# Altium PCB EDP_V3.PcbDoc
Units mil, origin at the board's own origin, x right, y up, seen from the top; angles counter-clockwise.
Board outline 1496.06 x 2204.77 mil, 2 copper layers (Top Layer, Bottom Layer); 19 components, 14 nets, 61 pads, 4 vias.
Unrouted connection lines stored in the file: 1.
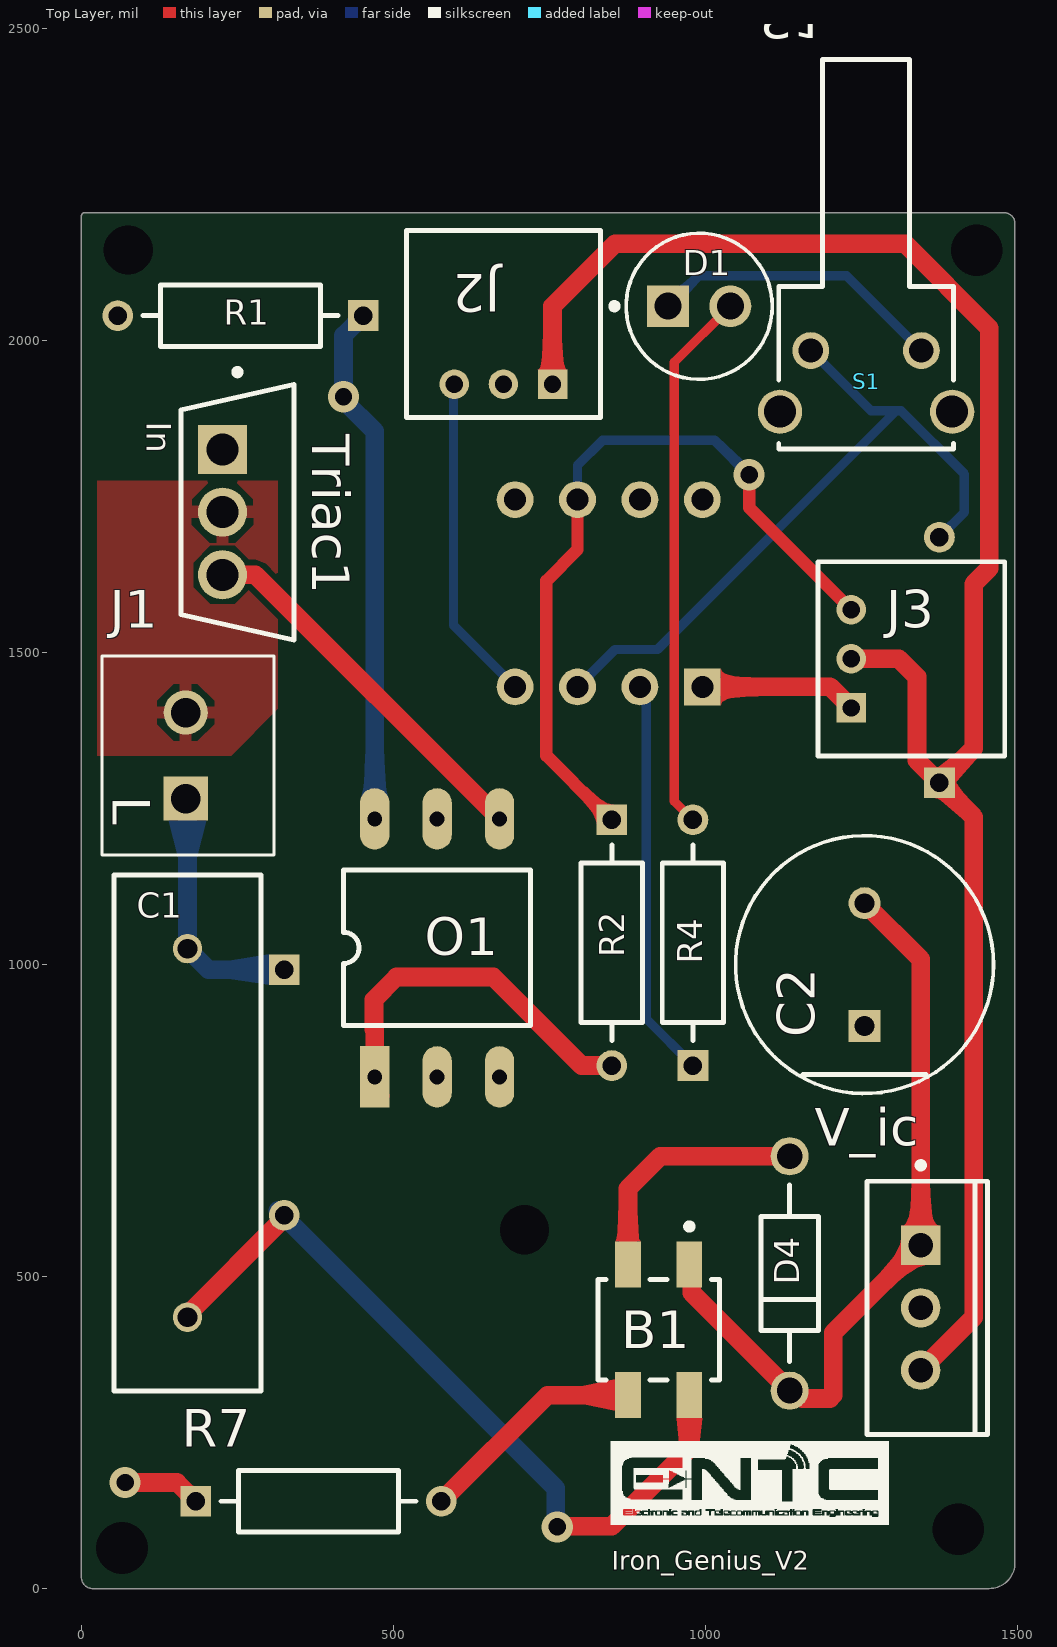
[diagram p0: Top Layer view]
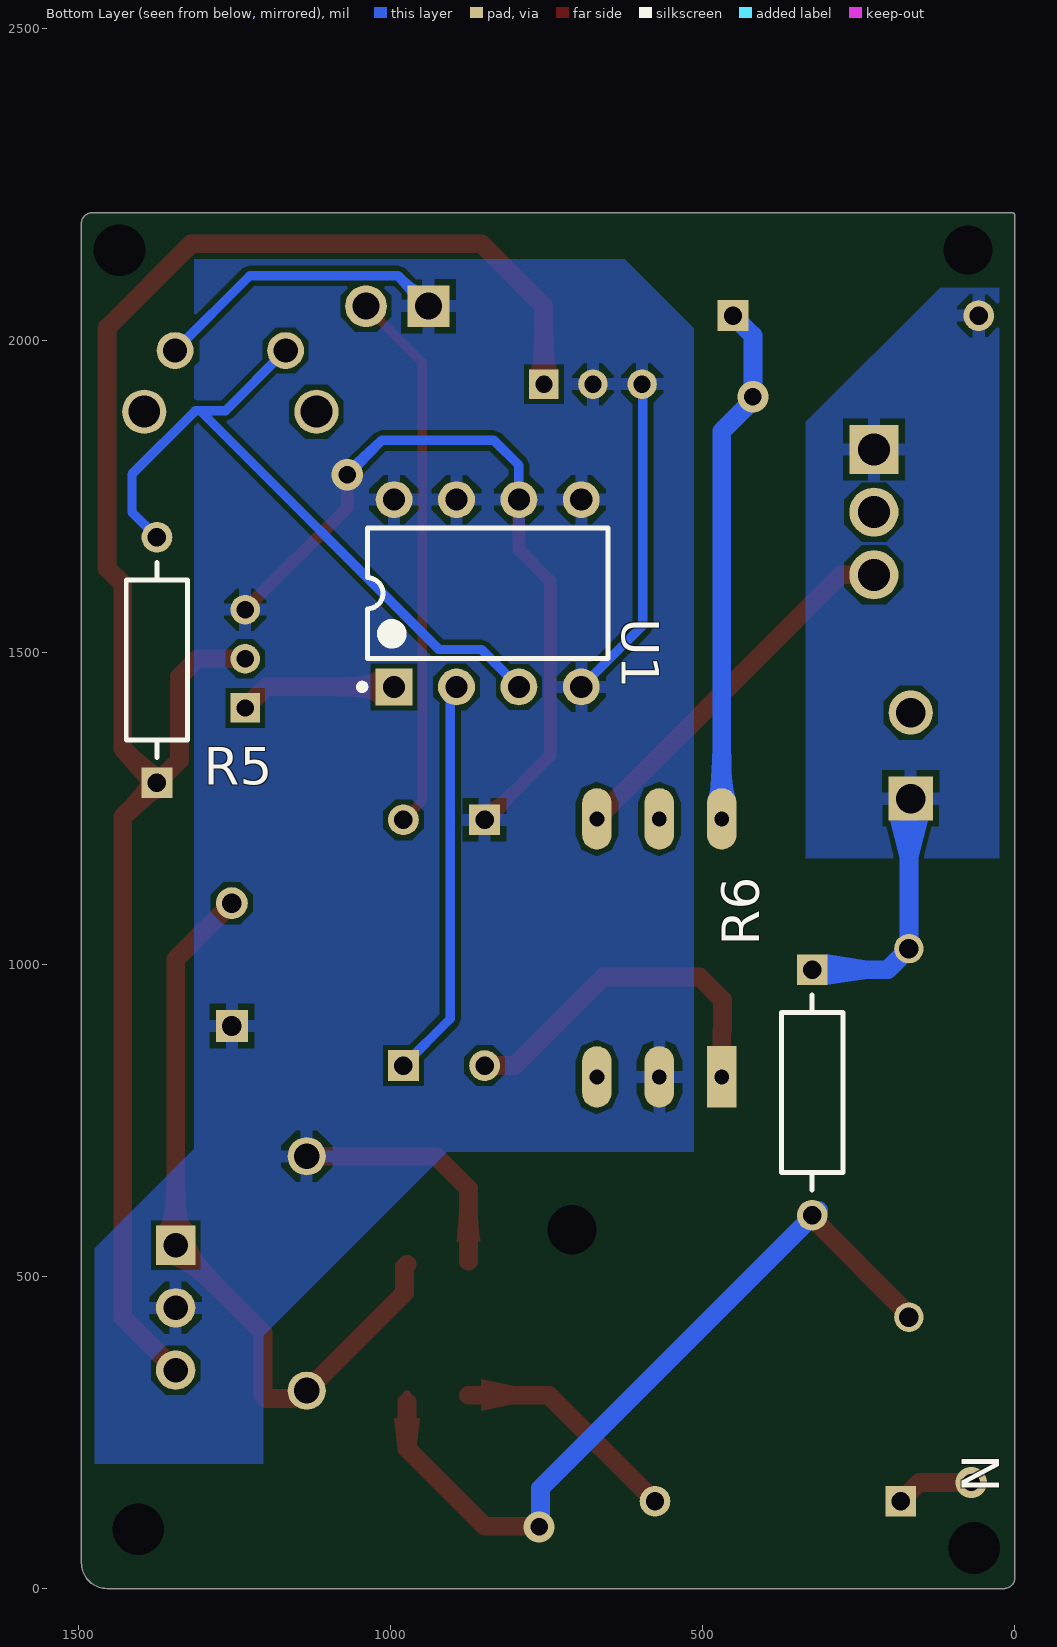
[diagram p1: Bottom Layer view, seen from below]
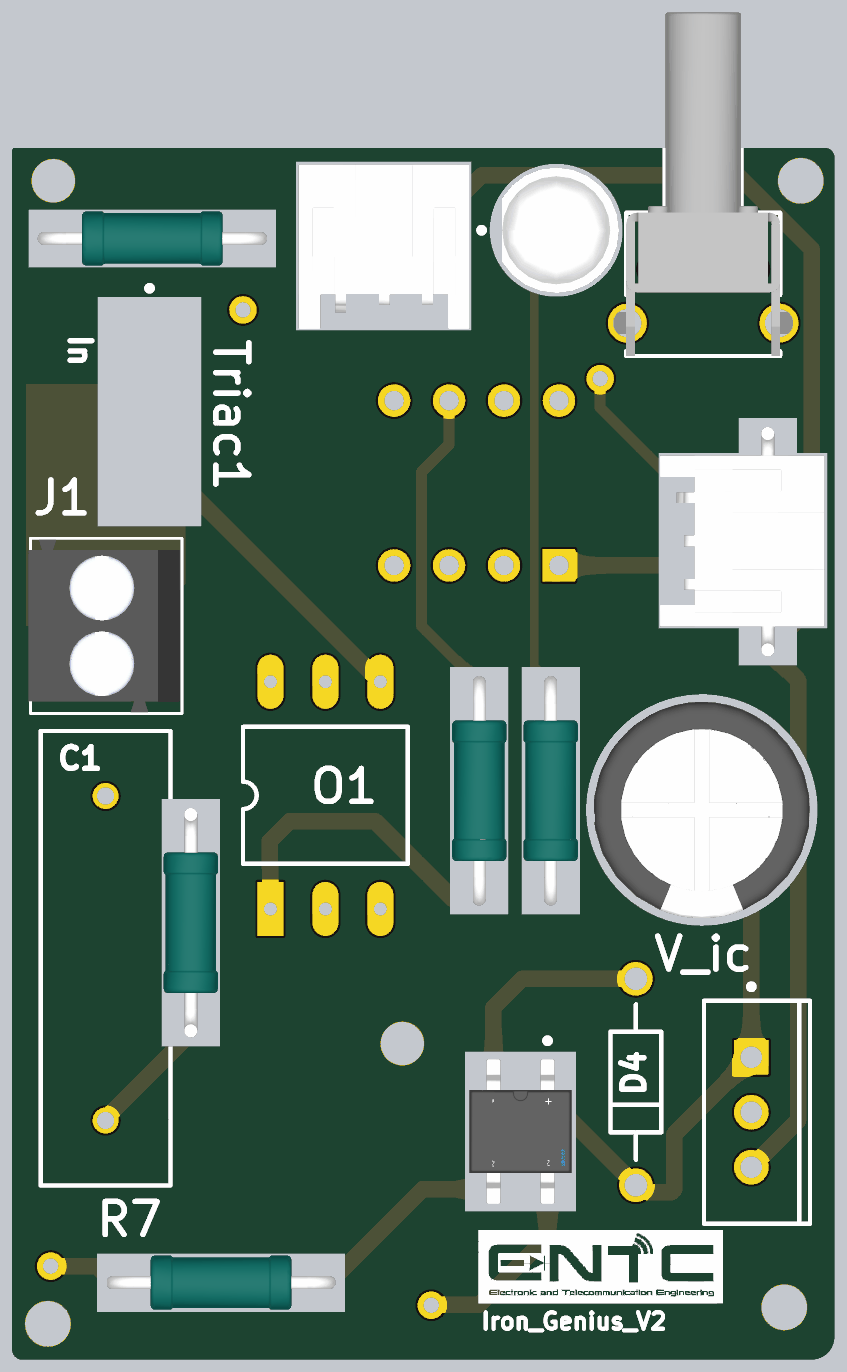
[diagram p2: 3D render of the assembled board from above, using the file's embedded part models]

## Layer stack, top to bottom
Top Solder: solder mask 1, SM-001, Dk 4
Top Layer: signal copper 1.4
Dielectric 1: dielectric 12.6, FR-4, Dk 4.8
Bottom Layer: signal copper 1.4
Bottom Solder: solder mask 1, SM-001, Dk 4

## Board outline
0,18 0,2200 cw(c4.78,2200) 5.08,2204.77 cw(c5.23,2200.5) 5.9,2204.72 1479.28,2204.72 cw(c1479.28,2187.94) 1496.06,2187.94 1496.06,41.06 cw(c1455,41.06) 1455,0 18,0 cw(c18,18)

## Design rules (kind name [scope] priority, off if disabled: settings)
BoardOutlineClearance [All] p1: gap=11.81 ignorepadtopadclearanceinfootprint=FALSE except(15.75: Arc-SplitBarrior Arc-SplitContinuation Track-SplitBarrior Track-SplitContinuation SMDPad-SplitBarrior SMDPad-SplitContinuation THPad-SplitBarrior THPad-SplitContinuation Via-SplitBarrior Via-SplitContinuation Fill-SplitBarrior Fill-SplitContinuation Poly-SplitBarrior Poly-SplitContinuation Region-SplitBarrior Region-SplitContinuation Text-SplitBarrior Text-SplitContinuation)
Clearance "Clearance Different Nets" [All] p1: gap=7.87 ignorepadtopadclearanceinfootprint=FALSE except(3.5: Arc-Arc Arc-Track Arc-SMDPad Track-Track Track-SMDPad; 5: SMDPad-SMDPad SMDPad-Via THPad-Via Via-Via; 10: Arc-Via Arc-Text Track-Via Track-Text SMDPad-Text THPad-Text Via-Text Fill-Text Poly-Text Region-Text Text-Text; 19.68: THPad-THPad Via-Hole)
Clearance "Clearance Same Nets" [All] p2: gap=7.87 ignorepadtopadclearanceinfootprint=FALSE except(3.5: Arc-Arc Arc-Track Arc-SMDPad Track-Track Track-SMDPad SMDPad-SMDPad; 5: SMDPad-Via THPad-Via; 10: Arc-Via Arc-Text Track-Via Track-Text SMDPad-Text THPad-Text Via-Via Via-Text Fill-Text Poly-Text Region-Text Text-Text)
Clearance "Clearance Bottom Layer" [OnLayer('Bottom Layer')] p3: gap=8 ignorepadtopadclearanceinfootprint=TRUE except(10: Arc-Text Track-Text SMDPad-Text THPad-Text Via-Text Fill-Text Poly-Text Region-Text Text-Text)
Clearance "Clearance Top Layer" [OnLayer('Top Layer')] p4: gap=8 ignorepadtopadclearanceinfootprint=TRUE except(10: Arc-Text Track-Text SMDPad-Text THPad-Text Via-Text Fill-Text Poly-Text Region-Text Text-Text)
HoleSize [All] p1: absolutevalues=TRUE maxlimit=248.03 minlimit=7.87 maxpercent=80.000 minpercent=20.000
MinimumAnnularRing [All] p1: minimumring=5.12
MinimumSolderMaskSliver [All] p1: minsoldermaskwidth=3.94
PolygonConnect PolygonConnect_1 [All] p1: thpad.connectstyle=Relief thpad.reliefconductorwidth=20 thpad.reliefentries=4 thpad.polygonreliefangle="90 Angle" thpad.airgapwidth=10 smdpad.connectstyle=Relief smdpad.reliefconductorwidth=20 smdpad.reliefentries=4 smdpad.polygonreliefangle="90 Angle" smdpad.airgapwidth=10 via.connectstyle=Direct via.reliefconductorwidth=20 via.reliefentries=4 via.polygonreliefangle="90 Angle" via.airgapwidth=10
RoutingCorners [All] p1: cornerstyle=Round minsetback=100 maxsetback=100
RoutingVias [All] p1: holewidth=19.68 width=39.37 viastyle="Through Hole" minholewidth=7.87 minwidth=13.78 maxholewidth=39.37 maxwidth=78.74
SilkToSilkClearance [All] p1: silktosilkclearance=3.94
SilkToSolderMaskClearance [IsPad] p1: minsilkscreentomaskgap=3.94 clearancetoexposedcopper=TRUE
SolderMaskExpansion [All] p1: expansion=4 istentingtop=FALSE
SupplyNets "Schematic Supply Nets_1" [InNet('Triac output')] p1: voltage=0.000
Width [All] p1: maxlimit=100 minlimit=3.5 preferedwidth=15
25 further rules are at their usual default settings.

## Classes and differential pairs
component class EDP_IronGenius_V3: B1 C2 D1 D4 J1 J2 J3 O1 R1 R2 R4 R5 R6 R7 S1 Triac1 U1 V_ic

## Components (designator, comment, footprint, x,y, rotation, side; value= is the part's Value field where it differs from the comment)
B1 "Bridge_rectifier" "Bridge rectifier" 925,415 r270 top
C1 "" "Capacitor 470nF 400V AC" 170,435 r90 top value=470nF
C2 "Electrolytic cap" "Electrolytic cap" 1255,1000 r90 top value=220uF
D1 "LED_Ind" LED_ind 990,2055 r0 top
D4 "Zener diode" Diode 1130,495 r90 top
J1 "AC power_connector" "AC power_connector" 162.13,1340 r90 top
J2 "Jack_for_sensor" Sensor_jack 676.26,2026.46 r0 top
J3 "Slide switch connector" Sensor_jack 1330,1490 r270 top
O1 "MOC3021" DIP6 470,820 r90 top
R1 "10K resistor" "10K resistor" 255,2040 r180 top value=1kR
R2 "220ohm_res" 220ohm_res 850,1035 r270 top value=220R
R4 "220ohm_res" 220ohm_res 980,1035 r90 top value=220R
R5 "1M_ohm" 1M_om 1375,1488.15 r90 bottom value=1MR
R6 "1M_ohm" 1M_om 325,795 r270 bottom value=1MR
R7 "220ohm_res" 220ohm_res 380,140 r0 top value=220R
S1 "PushButton" PushButton 1257.42,1934.98 r270 top
Triac1 "Triac" "Triac BTA16-600" 235,1730 r0 top
U1 "PIC12F675-I/P" PDIP300-P8 845,1605 r90 bottom
V_ic "MC7805CTG" IC7805 1365,445 r0 top

## Footprints (in the part's own frame and the unit in brackets; to place one, negate y for a bottom-side part, rotate by r counter-clockwise, add the part's x,y. Pads: shape width x height; smd on the part's side, far side on the other; paste and mask are expansions set on the pad)
1M_om [mm]
  rect 1.25x1.25 hole 0.75 paste-2539.97 mask+0: 1(-5,0)
  round 1.25 hole 0.75 paste-2539.97 mask+0: 2(5,0)
  silkscreen extent -3.98,-1.25 3.98,1.25, body extent -5.3,-1.25 5.3,1.25, height 2.5
"10K resistor" [mm]
  rect 1.25x1.25 hole 0.75 paste-2539.97 mask+0: 1(-5,0)
  round 1.25 hole 0.75 paste-2539.97 mask+0: 2(5,0)
  silkscreen extent -3.98,-1.25 3.98,1.25, body extent -5.3,-1.25 5.3,1.25, height 2.5
220ohm_res [mm]
  rect 1.25x1.25 hole 0.75 paste-2539.97 mask+0: 1(-5,0)
  round 1.25 hole 0.75 paste-2539.97 mask+0: 2(5,0)
  silkscreen extent -3.98,-1.25 3.98,1.25, body extent -5.72,-1.35 5.72,1.35, height 0.25
"AC power_connector" [mm]
  rect 1.8x1.8 / inner round 1.8 / far side rect 1.8x1.8 hole 1.2: 1(-1.877,-0.127)
  round 1.8 hole 1.2: 2(1.623,-0.127)
  silkscreen extent -4.18,-3.73 3.92,3.27, body extent -4.13,-3.63 3.87,3.37, height 8.4
"Bridge rectifier" [mm]
  rect 1.875x1.05 smd paste+0 mask+0: 1(-2.658,1.25) 2(2.667,1.25) 3(-2.658,-1.25) 4(2.667,-1.25)
  silkscreen extent -4.32,-2.47 2.05,2.47, body extent -3.7,-2.58 3.7,2.58, height 0.25
"Capacitor 470nF 400V AC" [mm]
  round 1.2 hole 0.8: 1(0,0) 2(15,0)
  silkscreen extent -3,-3 18,3
Diode [mm]
  round 1.55 hole 1.05: 1(-4.516,-0.127) 2(5.024,-0.127)
  silkscreen extent -3.34,-1.3 3.85,1.05
DIP6 [mm]
  rect 2.5x1.2 hole 0.6: 1(0,0)
  oval 2.5x1.2 hole 0.6: 2(0,-2.54) 3(0,-5.08) 4(10.5,-5.08) 5(10.5,-2.54) 6(10.5,0)
  silkscreen extent 2.08,-6.35 8.41,1.27
"Electrolytic cap" [mm]
  rect 1.3x1.3 hole 0.8 paste-2539.97 mask+0: 1(-2.5,0)
  round 1.3 hole 0.8 paste-2539.97 mask+0: 2(2.5,0)
  silkscreen extent -5.25,-5.25 5.25,5.25, body extent -5.35,-5.35 5.35,5.35, height 0.25
IC7805 [mm]
  rect 1.6x1.6 hole 1: 1(-0.508,2.667)
  round 1.6 hole 1: 2(-0.508,0.127) 3(-0.508,-2.413)
  silkscreen extent -2.69,-5.02 2.21,6.05, body extent -2.67,-5.02 2.18,5.28, height 19.68
LED_ind [mm]
  rect 1.7x1.7 hole 1.1 paste-2539.97 mask+0: 1(-1.27,0)
  round 1.7 hole 1.1 paste-2539.97 mask+0: 2(1.27,0)
  silkscreen extent -3.57,-2.97 2.98,2.97, body extent -2.5,-2.9 2.89,2.9, height 9.11
PDIP300-P8 [mm] "8-Pin Plastic Dual In-Line Package (PDIP)"
  rect 1.5x1.5 hole 0.9: 1(-4.064,3.81)
  round 1.5 hole 0.9: 2(-4.064,1.27) 3(-4.064,-1.27) 4(-4.064,-3.81) 5(3.556,-3.81) 6(3.556,-1.27) 7(3.556,1.27) 8(3.556,3.81)
  silkscreen extent -4.19,-4.9 2.4,5.24, body extent -3.8,-4.9 3.3,4.9, height 4.32
PushButton [mm]
  round 1.5 hole 0.99: 1(-1.245,-2.25) 2(-1.245,2.25)
  round 1.8 hole 1.3: MH1(1.245,-3.505) MH2(1.245,3.505)
  silkscreen extent -13.09,-3.55 2.77,3.55, body extent -13.11,-4.2 2.76,4.2, height 7.01
Sensor_jack [mm]
  rect 1.2x1.2 hole 0.7 paste-2539.97 mask+0: 1(2,-2.45)
  round 1.2 hole 0.7 paste-2539.97 mask+0: 2(0,-2.45) 3(-2,-2.45)
  silkscreen extent -3.95,-3.8 3.95,3.8, body extent -4.04,-3.94 4.06,3.86, height 0.25
"Triac BTA16-600" [mm]
  rect 2x2 hole 1.3 paste-2539.97 mask+0: 1(-0.226,2.423)
  round 2 hole 1.3 paste-2539.97 mask+0: 2(-0.226,-0.127) 3(-0.226,-2.677)
  silkscreen extent -1.92,-5.33 2.68,5.7

## Part data
B1: "Bridge Rectifier Diode, 1 Phase, 0.8A, 1000V V(RRM), Silicon", Manufacturer=Diodes, Manufacturer Part Number=MB10F-13, Supplier Part Number=MB10F-13DICT-ND, Category=Diodes, ComponentLink1Description=https://datasheet.ciiva.com:443/pdfs/VipMasterIC/IC/DIOD/DIOD-S-A0003097097/DIOD-S-A0003097097-1.pdf?src-supplier=IHS+Markit, ComponentLink1URL=https://datasheet.ciiva.com:443/pdfs/VipMasterIC/IC/DIOD/DIOD-S-A0003097097/DIOD-S-A0003097097-1.pdf?src-supplier=IHS+Markit, ComponentLink2Description=https://www.diodes.com/assets/Datasheets/MB10F.pdf?src-supplier=Digikey, ComponentLink2URL=https://www.diodes.com/assets/Datasheets/MB10F.pdf?src-supplier=Digikey, Diode Type=RECTIFIER, JESD-609 Code=e3, Pricing="1=0.56, 10=0.346, 100=0.2202, 500=0.16594, 1000=0.13963, 2000=0.13364 (USD)", Reach SVHC Compliant=No, RoHS=Yes, RoHS Compliant=Yes, Stock=10908, Supplier=Digikey, Terminal Finish=Tin
C1: library part Component_2, "Film Capacitor, Polypropylene, 630V, 5% +Tol, 5% -Tol, 0.47uF, Through Hole Mount", Capacitor Type=FILM, Dielectric Material=Polypropylene, Manufacturer=KEMET, Manufacturer Part Number=R76PR3470SE30J, Max Operating Temperature=85°C, Min Operating Temperature=-55°C, Package Shape=Rectangular, Package Style=RadialMeter, Rated AC Voltage (URac)=400V, Rated DC Voltage (URdc)=630V, Supplier Part Number=399-7615-ND, Tolerance  (fill in as +-)=5%, Additional Feature="RATED AC VOLTAGE (V): 400", Category="Film Capacitors", ComponentLink1Description=https://datasheet.ciiva.com:443/pdfs/VipMasterIC/IC/KEME/KEME-S-A0009156830/KEME-S-A0009156830-1.pdf?src-supplier=IHS+Markit, ComponentLink1URL=https://datasheet.ciiva.com:443/pdfs/VipMasterIC/IC/KEME/KEME-S-A0009156830/KEME-S-A0009156830-1.pdf?src-supplier=IHS+Markit, ComponentLink2Description=http://www.mouser.com/ds/2/212/KEM_F3034_R76-458534.pdf?src-supplier=Mouser, ComponentLink2URL=http://www.mouser.com/ds/2/212/KEM_F3034_R76-458534.pdf?src-supplier=Mouser, ComponentLink3Description=https://search.kemet.com/component-edge/download/datasheet/R76PR3470SE30J.pdf?src-supplier=Digikey, ComponentLink3URL=https://search.kemet.com/component-edge/download/datasheet/R76PR3470SE30J.pdf?src-supplier=Digikey, Height=22mm, Length=32mm, Mounting Technology="Through Hole", Packaging=Bulk, Pins=2, Pricing="1=3.32, 10=2.388, 50=1.9644, 480=1.56423, 960=1.47382, 1440=1.42641, 2880=1.35362, 5280=1.29756 (USD)", Reach SVHC Compliant=Yes, RoHS=Yes, RoHS Compliant=Yes, Stock=336, Supplier=Digikey, Terminal Pitch=27.5mm, Termination=Wire, Tolerance (fill in as +-)=5%, Width=13mm
C2: "Aluminum Electrolytic Capacitor, Polarized, Aluminum (wet), 50V, 20% +Tol, 20% -Tol, 220uF, Through Hole Mount", Capacitor Type=Aluminium, Leakage Current=110uA, Manufacturer=Panasonic, Manufacturer Part Number=EEU-FR1H221B, Manufacturer Series=FR, Max Operating Temperature=105°C, Min Operating Temperature=-40°C, Package Shape=Cylindrical, Package Style=RadialMeter, Rated DC Voltage (URdc)=50V, Ripple Current=1.155A, Supplier Part Number=P15375CT-ND, Tolerance  (fill in as +-)=20%, Category="Aluminum Electrolytic Capacitors", ComponentLink1Description=https://datasheet.ciiva.com:443/pdfs/VipMasterIC/IC/PANA/PANA-S-A0009000947/PANA-S-A0009000947-1.pdf?src-supplier=IHS+Markit, ComponentLink1URL=https://datasheet.ciiva.com:443/pdfs/VipMasterIC/IC/PANA/PANA-S-A0009000947/PANA-S-A0009000947-1.pdf?src-supplier=IHS+Markit, Diameter=10mm, Dielectric Material=Aluminium, JESD-609 Code=e3, Length=16mm, Mounting Technology="Through Hole", Packaging="Tape and Reel", Pins=2, Polarity=Polarized, Pricing="1=0.84, 10=0.53, 50=0.3992, 100=0.358 (USD)", Reach SVHC Compliant=Yes, RoHS=Yes, RoHS Compliant=Yes, Series=EEU-FR, Supplier=Digikey, Tan Delta=0.1, Terminal Finish=Tin, Terminal Pitch=5mm, Termination=Wire, Tolerance (fill in as +-)=20%
D1: "Single Color LED, Yellow, Tinted Diffused, T-1, 3mm", Color=Yellow, Forward Current=7mA, Forward Voltage=2.7V, Manufacturer="Broadcom Avago", Manufacturer Part Number=HLMP-1719, Max Operating Temperature=100°C, Min Operating Temperature=-40°C, Supplier Part Number=516-1309-ND, Category=LEDs, Channels=1, Color@wavelength=Yellow, ComponentLink1Description=https://datasheet.ciiva.com:443/pdfs/VipMasterIC/IC/AVGO/AVGOS05570/AVGOS05570-1.pdf?src-supplier=IHS+Markit, ComponentLink1URL=https://datasheet.ciiva.com:443/pdfs/VipMasterIC/IC/AVGO/AVGOS05570/AVGOS05570-1.pdf?src-supplier=IHS+Markit, ComponentLink2Description=https://datasheet.ciiva.com/11773/0900766b800204ad-11773897.pdf?src-supplier=Rs, ComponentLink2URL=https://datasheet.ciiva.com/11773/0900766b800204ad-11773897.pdf?src-supplier=Rs, ComponentLink3Description=https://datasheet.ciiva.com/19482/253673-19482303.pdf?src-supplier=Jameco, ComponentLink3URL=https://datasheet.ciiva.com/19482/253673-19482303.pdf?src-supplier=Jameco, ComponentLink4Description=https://datasheet.ciiva.com/15117/getdatasheetpartid-111138-15117505.pdf?src-supplier=Verical, ComponentLink4URL=https://datasheet.ciiva.com/15117/getdatasheetpartid-111138-15117505.pdf?src-supplier=Verical, ComponentLink5Description=https://datasheet.ciiva.com/1244/1715378-1244676.pdf?src-supplier=Element14, ComponentLink5URL=https://datasheet.ciiva.com/1244/1715378-1244676.pdf?src-supplier=Element14, ComponentLink6Description=https://datasheet.ciiva.com/29334/180618-da-01-en-led-3mm-hlmp-1719-gelb-29334897.pdf?src-supplier=Conrad, ComponentLink6URL=https://datasheet.ciiva.com/29334/180618-da-01-en-led-3mm-hlmp-1719-gelb-29334897.pdf?src-supplier=Conrad, ComponentLink7Description=https://datasheet.ciiva.com/14183/efhlmp17x-47xx-en-14183894.pdf?src-supplier=Distrelec, ComponentLink7URL=https://datasheet.ciiva.com/14183/efhlmp17x-47xx-en-14183894.pdf?src-supplier=Distrelec, ComponentLink8Description=https://datasheet.ciiva.com/14605/70157746-14605453.pdf?src-supplier=Allied+Electronics, ComponentLink8URL=https://datasheet.ciiva.com/14605/70157746-14605453.pdf?src-supplier=Allied+Electronics, JESD-609 Code=e3, Lens Style=Diffused,Tinted, Luminous Intensity-Nom=2.1mcd, Mounting Technology=Radial, Optoelectronic Device Type="SINGLE COLOR LED", Overall Height=4.445mm, Packaging=Bulk, Pins=2, Pricing="1=0.42, 10=0.287, 100=0.2048, 500=0.1675, 1000=0.15521, 2000=0.14474, 6000=0.13128, 10000=0.12612, 26000=0.11801 (USD)", Reach SVHC Compliant=Yes, RoHS=Yes, RoHS Compliant=Yes, Shape=Round, Size=3mm, Stock=87102, Supplier=Digikey, T-code=T-1, Terminal Finish=Tin, Terminal Pitch=2.54mm, Viewing Angle=50°
D4: library part Diode, "Rectifier Diode, 1 Phase, 1 Element, 1A, 1000V V(RRM), Silicon, DO-41", Case Connection=Isolated, Forward Voltage=1.1V, Manufacturer="ON Semiconductor", Manufacturer Part Number=1N4007RLG, Max Operating Temperature=175°C, Max Output current=1A, Min Operating Temperature=-65°C, Non-rep Pk Forward Current-Max=30A, Package Body Material=Plastic, Package Shape=Round, Package Style="LONG FORMMeter", Peak Reflow Temperature (Cel)=260°C, Rep Pk Reverse Voltage-Max=1kV, Supplier Part Number=1N4007RLGOSCT-ND, Time @ Peak Reflow Temperature-Max (s)=40s, Category="Rectifier Diodes", ComponentLink1Description=https://datasheet.ciiva.com:443/pdfs/VipMasterIC/IC/ONSM/ONSM-S-A0005492811/ONSM-S-A0005492811-1.pdf?src-supplier=IHS+Markit, ComponentLink1URL=https://datasheet.ciiva.com:443/pdfs/VipMasterIC/IC/ONSM/ONSM-S-A0005492811/ONSM-S-A0005492811-1.pdf?src-supplier=IHS+Markit, ComponentLink2Description=https://datasheet.ciiva.com/915/1n4001-d-915344.pdf?src-supplier=Digikey, ComponentLink2URL=https://datasheet.ciiva.com/915/1n4001-d-915344.pdf?src-supplier=Digikey, ComponentLink3Description=https://datasheet.ciiva.com/915/1n4001-d-915345.pdf?src-supplier=Digikey, ComponentLink3URL=https://datasheet.ciiva.com/915/1n4001-d-915345.pdf?src-supplier=Digikey, ComponentLink4Description=https://datasheet.ciiva.com/3304/1n4001-d-3304216.pdf?src-supplier=Avnet, ComponentLink4URL=https://datasheet.ciiva.com/3304/1n4001-d-3304216.pdf?src-supplier=Avnet, Diode Element Material=SILICON, Diode Type=RECTIFIER, JEDEC-95 Code=DO-41, JESD-30 Code=O-PALF-W2, JESD-609 Code=e3, Number of Elements=1, Pins=2, Pricing="1=0.19, 10=0.116, 100=0.0724, 500=0.0535, 1000=0.04635, 2000=0.04211 (USD)", Qualification Status="Not Qualified", Reach SVHC Compliant=No, RoHS=Yes, RoHS Compliant=Yes, Stock=2581, Supplier=Digikey, Surface Mount=No, Terminal Finish=Tin, Terminal Form=Wire, Terminal Position=AXIAL
J1: "Barrier Strip Terminal Block, 10A, 1 Row(s), 1 Deck(s)", Current Rating=10A, Manufacturer="On-Shore Technology", Manufacturer Part Number=OSTTE020104, Voltage Rating=125V, Additional Feature="STANDARD: UL 94V-0, THERMOPLASTIC", Category="Terminal Blocks", ComponentLink1Description=https://datasheet.ciiva.com:443/pdfs/VipMasterIC/IC/ONST/ONST-S-A0002844285/ONST-S-A0002844285-1.pdf?src-supplier=IHS+Markit, ComponentLink1URL=https://datasheet.ciiva.com:443/pdfs/VipMasterIC/IC/ONST/ONST-S-A0002844285/ONST-S-A0002844285-1.pdf?src-supplier=IHS+Markit, ComponentLink2Description=http://www.on-shore.com/wp-content/uploads/2015/09/osttexx0164.pdf?src-supplier=Verical, ComponentLink2URL=http://www.on-shore.com/wp-content/uploads/2015/09/osttexx0164.pdf?src-supplier=Verical, ComponentLink3Description=http://www.on-shore.com/wp-content/uploads/2015/09/osttexx0164.pdf?src-supplier=Digikey, ComponentLink3URL=http://www.on-shore.com/wp-content/uploads/2015/09/osttexx0164.pdf?src-supplier=Digikey, ComponentLink4Description=http://www.on-shore.com/wp-content/uploads/2015/09/osttexx0164.pdf?src-supplier=Arrow+Electronics, ComponentLink4URL=http://www.on-shore.com/wp-content/uploads/2015/09/osttexx0164.pdf?src-supplier=Arrow+Electronics, Fastening Method=SCREW, Mounting Technology=Board, Number of Decks=1, Number of Rows=1, Number of Ways=2, Pricing="1=0.2592, 10=0.193, 25=0.1668, 50=0.1485, 100=0.1326, 250=0.1154, 500=0.1046, 1000=0.0957, 5000=0.0823 (USD)", Reach SVHC Compliant=Yes, RoHS=Yes, RoHS Compliant=Yes, Safety Approval=UL,CUL, Stock=2, Supplier="Arrow Electronics", Supplier Part Number=OSTTE020104, Terminal and Terminal Block Type="BARRIER STRIP TERMINAL BLOCK", Wire/Cable Gauge=16AWG
J2: "Conn Shrouded Header (4 Sides) HDR 3 POS 2mm Solder RA Side Entry Thru-Hole Box", Manufacturer=JST, Manufacturer Part Number=S3B-PH-K-S(LF)(SN), Supplier Part Number=306-S3BPHKSLFSN, Category="Headers and Wire Housings", ComponentLink1Description=http://www.farnell.com/datasheets/2057211.pdf?src-supplier=Farnell, ComponentLink1URL=http://www.farnell.com/datasheets/2057211.pdf?src-supplier=Farnell, ComponentLink2Description=https://datasheet.octopart.com/S3B-PH-K-S%28LF%29%28SN%29-JST-datasheet-56537.pdf?src-supplier=Future+Electronics, ComponentLink2URL=https://datasheet.octopart.com/S3B-PH-K-S%28LF%29%28SN%29-JST-datasheet-56537.pdf?src-supplier=Future+Electronics, ComponentLink3Description=http://www.farnell.com/datasheets/2057211.pdf?src-supplier=Newark, ComponentLink3URL=http://www.farnell.com/datasheets/2057211.pdf?src-supplier=Newark, ComponentLink4Description=http://www.jst-mfg.com/product/pdf/eng/ePH.pdf?src-supplier=Digikey, ComponentLink4URL=http://www.jst-mfg.com/product/pdf/eng/ePH.pdf?src-supplier=Digikey, ComponentLink5Description=http://datasheet.octopart.com/S3B-PH-K-S-%28LF%29%28SN%29-JST-datasheet-15068535.pdf?src-supplier=TME, ComponentLink5URL=http://datasheet.octopart.com/S3B-PH-K-S-%28LF%29%28SN%29-JST-datasheet-15068535.pdf?src-supplier=TME, ComponentLink6Description=https://datasheet.octopart.com/S3B-PH-K-S%28LF%29%28SN%29-JST-datasheet-147762421.pdf?src-supplier=LKR, ComponentLink6URL=https://datasheet.octopart.com/S3B-PH-K-S%28LF%29%28SN%29-JST-datasheet-147762421.pdf?src-supplier=LKR, Pricing="1=0.15, 10=0.125, 50=0.125, 100=0.103, 1000=0.072, 10000=0.067 (USD)", RoHS=Yes, Stock=230157, Supplier=Mouser
J3: library part Jack_for_sensor, "Conn Shrouded Header (4 Sides) HDR 3 POS 2mm Solder RA Side Entry Thru-Hole Box", Manufacturer=JST, Manufacturer Part Number=S3B-PH-K-S(LF)(SN), Supplier Part Number=306-S3BPHKSLFSN, Category="Headers and Wire Housings", ComponentLink1Description=http://www.farnell.com/datasheets/2057211.pdf?src-supplier=Farnell, ComponentLink1URL=http://www.farnell.com/datasheets/2057211.pdf?src-supplier=Farnell, ComponentLink2Description=https://datasheet.octopart.com/S3B-PH-K-S%28LF%29%28SN%29-JST-datasheet-56537.pdf?src-supplier=Future+Electronics, ComponentLink2URL=https://datasheet.octopart.com/S3B-PH-K-S%28LF%29%28SN%29-JST-datasheet-56537.pdf?src-supplier=Future+Electronics, ComponentLink3Description=http://www.farnell.com/datasheets/2057211.pdf?src-supplier=Newark, ComponentLink3URL=http://www.farnell.com/datasheets/2057211.pdf?src-supplier=Newark, ComponentLink4Description=http://www.jst-mfg.com/product/pdf/eng/ePH.pdf?src-supplier=Digikey, ComponentLink4URL=http://www.jst-mfg.com/product/pdf/eng/ePH.pdf?src-supplier=Digikey, ComponentLink5Description=http://datasheet.octopart.com/S3B-PH-K-S-%28LF%29%28SN%29-JST-datasheet-15068535.pdf?src-supplier=TME, ComponentLink5URL=http://datasheet.octopart.com/S3B-PH-K-S-%28LF%29%28SN%29-JST-datasheet-15068535.pdf?src-supplier=TME, ComponentLink6Description=https://datasheet.octopart.com/S3B-PH-K-S%28LF%29%28SN%29-JST-datasheet-147762421.pdf?src-supplier=LKR, ComponentLink6URL=https://datasheet.octopart.com/S3B-PH-K-S%28LF%29%28SN%29-JST-datasheet-147762421.pdf?src-supplier=LKR, Pricing="1=0.15, 10=0.125, 50=0.125, 100=0.103, 1000=0.072, 10000=0.067 (USD)", RoHS=Yes, Stock=230157, Supplier=Mouser
O1: "OPTOISOLATOR 4.17KV TRIAC 6DIP", Manufacturer="ON Semiconductor / Fairchild", Manufacturer Part Number=MOC3021M, Supplier Part Number=MOC3021MFS-ND, Category=Optocouplers, ComponentLink1Description=https://datasheet.ciiva.com/30526/moc3010m-30526103.pdf?src-supplier=Digikey, ComponentLink1URL=https://datasheet.ciiva.com/30526/moc3010m-30526103.pdf?src-supplier=Digikey, ComponentLink2Description=https://datasheet.ciiva.com/48435/oemoc301xm-moc302xm-e-48435605.pdf?src-supplier=Distrelec, ComponentLink2URL=https://datasheet.ciiva.com/48435/oemoc301xm-moc302xm-e-48435605.pdf?src-supplier=Distrelec, Pricing="1=0.85, 50=0.4714, 100=0.4321, 500=0.36196, 1000=0.33895, 2000=0.31941, 5000=0.29807, 10000=0.28477, 25000=0.27027 (USD)", RoHS=Yes, Stock=1948, Supplier=Digikey
R1: "Fixed Resistor, Thin Film, 0.6W, 1000ohm, 350V, 1% +/-Tol, 50ppm/Cel, Through Hole Mount", Manufacturer=Vishay, Manufacturer Part Number=MRS25000C1001FCT00, Max Operating Temperature=155°C, Min Operating Temperature=-55°C, Package Length=6.5mm, Package Style=AXIAL, Power=600mW, Rated Temperature=70°C, Resistor Type="FIXED RESISTOR", Temperature Coefficient (ppm/Cel)=50, Tolerance=1%, Working Voltage=350V, Additional Feature="RATED AC VOLTAGE: 350V", Category="Through-Hole Resistors", ComponentLink1Description=https://datasheet.ciiva.com:443/pdfs/VipMasterIC/IC/VISH/VISH-S-A0002281164/VISH-S-A0002281164-1.pdf?src-supplier=IHS+Markit, ComponentLink1URL=https://datasheet.ciiva.com:443/pdfs/VipMasterIC/IC/VISH/VISH-S-A0002281164/VISH-S-A0002281164-1.pdf?src-supplier=IHS+Markit, ComponentLink2Description=https://datasheet.ciiva.com/11823/0900766b80d9a016-11823229.pdf?src-supplier=Rs, ComponentLink2URL=https://datasheet.ciiva.com/11823/0900766b80d9a016-11823229.pdf?src-supplier=Rs, ComponentLink3Description=https://datasheet.ciiva.com/8401/mrs16m25-8401227.pdf?src-supplier=Avnet, ComponentLink3URL=https://datasheet.ciiva.com/8401/mrs16m25-8401227.pdf?src-supplier=Avnet, ComponentLink4Description=https://datasheet.ciiva.com/16464/mrs16m25-16464630.pdf?src-supplier=Future+Electronics, ComponentLink4URL=https://datasheet.ciiva.com/16464/mrs16m25-16464630.pdf?src-supplier=Future+Electronics, ComponentLink5Description=https://datasheet.ciiva.com/7836/mrs16m25-7836234.pdf?src-supplier=Element14, ComponentLink5URL=https://datasheet.ciiva.com/7836/mrs16m25-7836234.pdf?src-supplier=Element14, ComponentLink6Description=https://datasheet.ciiva.com/28605/1911198-28605880.pdf?src-supplier=Element14, ComponentLink6URL=https://datasheet.ciiva.com/28605/1911198-28605880.pdf?src-supplier=Element14, ComponentLink7Description=https://datasheet.ciiva.com/46412/1756157-46412631.pdf?src-supplier=Element14, ComponentLink7URL=https://datasheet.ciiva.com/46412/1756157-46412631.pdf?src-supplier=Element14, Construction=Tubular, JESD-609 Code=e3, Lead Diameter=0.6mm, Lead Length=28mm, Mounting Technology="Through Hole", Packaging="Ammo Pack", Pins=2, Pricing="5000=0.0494, 10000=0.0461, 15000=0.0458, 25000=0.0443, 35000=0.0429, 50000=0.0414, 125000=0.0384, 250000=0.0366 (USD)", Reach SVHC Compliant=Yes, RoHS=Yes, RoHS Compliant=Yes, Stock=5000, Supplier="Arrow Electronics", Supplier Part Number=MRS25000C1001FCT00, Technology="THIN FILM", Terminal Finish=Tin, Termination=Wire
R2 R4 R7: "Fixed Resistor, Metal Film, 0.25W, 220ohm, 200V, 1% +/-Tol, 50ppm/Cel, Through Hole Mount", Manufacturer="Vishay Beyschlag", Manufacturer Part Number=MBA02040C2200FC100, Max Operating Temperature=155°C, Min Operating Temperature=-55°C, Package Length=3.6mm, Package Shape=Tubular, Package Style=AXIAL, Power=400mW, Rated Temperature=70°C, Resistor Type="FIXED RESISTOR", Temperature Coefficient (ppm/Cel)=50, Tolerance=1%, Working Voltage=200V, Category="Through-Hole Resistors", ComponentLink1Description=https://datasheet.ciiva.com:443/pdfs/VipMasterIC/IC/VISH/VISH-S-A0005972005/VISH-S-A0005972005-1.pdf?src-supplier=IHS+Markit, ComponentLink1URL=https://datasheet.ciiva.com:443/pdfs/VipMasterIC/IC/VISH/VISH-S-A0005972005/VISH-S-A0005972005-1.pdf?src-supplier=IHS+Markit, ComponentLink2Description=http://uk.rs-online.com/webdocs/09bb/0900766b809bb010.pdf?src-supplier=Rs, ComponentLink2URL=http://uk.rs-online.com/webdocs/09bb/0900766b809bb010.pdf?src-supplier=Rs, ComponentLink3Description=http://www.alliedelec.com/m/d/72a9b4b9281933b6a3b8fa3f9583e3eb.pdf?src-supplier=Allied+Electronics, ComponentLink3URL=http://www.alliedelec.com/m/d/72a9b4b9281933b6a3b8fa3f9583e3eb.pdf?src-supplier=Allied+Electronics, ComponentLink4Description=http://www.mouser.com/ds/2/427/mbxsma-239744.pdf?src-supplier=Mouser, ComponentLink4URL=http://www.mouser.com/ds/2/427/mbxsma-239744.pdf?src-supplier=Mouser, ComponentLink5Description=http://www.vishay.com/docs/28766/28766.pdf?src-supplier=Avnet, ComponentLink5URL=http://www.vishay.com/docs/28766/28766.pdf?src-supplier=Avnet, ComponentLink6Description=http://www.vishay.com/docs/28766/mbxsma.pdf?src-supplier=Digikey, ComponentLink6URL=http://www.vishay.com/docs/28766/mbxsma.pdf?src-supplier=Digikey, ComponentLink7Description=https://datasheet.octopart.com/MBA02040C2200FC100-Vishay-datasheet-62042582.pdf?src-supplier=TME, ComponentLink7URL=https://datasheet.octopart.com/MBA02040C2200FC100-Vishay-datasheet-62042582.pdf?src-supplier=TME, Construction=Tubular, JESD-609 Code=e3, Lead Diameter=0.5mm, Lead Length=29mm, Mounting Technology="Through Hole", Packaging=Bulk, Pins=2, Pricing="1=0.4263, 10=0.3254, 25=0.2532, 100=0.2246, 250=0.2007, 500=0.1662, 1000=0.1282 (USD)", Reach SVHC Compliant=Yes, Reference Standard=AEC-Q200, RoHS=Yes, RoHS Compliant=Yes, Stock=1000, Supplier="Arrow Electronics", Supplier Part Number=MBA02040C2200FC100, Technology="THIN FILM", Terminal Finish=Tin, Termination=Wire
R5 R6: "Fixed Resistor, Metal Film, 0.5W, 1000000ohm, 3500V, 1% +/-Tol, 200ppm/Cel, Through Hole Mount", Manufacturer="Vishay BCcomponents", Manufacturer Part Number=HVR3700001004FR500, Max Operating Temperature=155°C, Min Operating Temperature=-55°C, Package Length=12mm, Package Shape=Tubular, Package Style=AXIAL, Power=500mW, Rated Temperature=70°C, Resistor Type="FIXED RESISTOR", Temperature Coefficient (ppm/Cel)=200, Tolerance=1%, Working Voltage=3.5kV, Category="Through-Hole Resistors", ComponentLink1Description=https://datasheet.ciiva.com:443/pdfs/VipMasterIC/IC/VISH/VISH-S-A0005972020/VISH-S-A0005972020-1.pdf?src-supplier=IHS+Markit, ComponentLink1URL=https://datasheet.ciiva.com:443/pdfs/VipMasterIC/IC/VISH/VISH-S-A0005972020/VISH-S-A0005972020-1.pdf?src-supplier=IHS+Markit, ComponentLink2Description=https://datasheet.ciiva.com/5487/hvr25-110254-5487353.pdf?src-supplier=Mouser, ComponentLink2URL=https://datasheet.ciiva.com/5487/hvr25-110254-5487353.pdf?src-supplier=Mouser, ComponentLink3Description=https://datasheet.ciiva.com/5897/653840-5897692.pdf?src-supplier=Farnell, ComponentLink3URL=https://datasheet.ciiva.com/5897/653840-5897692.pdf?src-supplier=Farnell, ComponentLink4Description=https://datasheet.ciiva.com/29922/hvr2537-29922493.pdf?src-supplier=Avnet, ComponentLink4URL=https://datasheet.ciiva.com/29922/hvr2537-29922493.pdf?src-supplier=Avnet, ComponentLink5Description=https://datasheet.ciiva.com/48465/hvr2537-48465885.pdf?src-supplier=Avnet, ComponentLink5URL=https://datasheet.ciiva.com/48465/hvr2537-48465885.pdf?src-supplier=Avnet, ComponentLink6Description=https://datasheet.ciiva.com/2712/hvr2537-2712546.pdf?src-supplier=Digikey, ComponentLink6URL=https://datasheet.ciiva.com/2712/hvr2537-2712546.pdf?src-supplier=Digikey, ComponentLink7Description=https://datasheet.ciiva.com/2712/hvr2537-2712547.pdf?src-supplier=Digikey, ComponentLink7URL=https://datasheet.ciiva.com/2712/hvr2537-2712547.pdf?src-supplier=Digikey, ComponentLink8Description=https://datasheet.ciiva.com/46448/653840-46448778.pdf?src-supplier=Element14, ComponentLink8URL=https://datasheet.ciiva.com/46448/653840-46448778.pdf?src-supplier=Element14, ComponentLink9Description=https://datasheet.ciiva.com/46412/653840-46412630.pdf?src-supplier=Element14, ComponentLink9URL=https://datasheet.ciiva.com/46412/653840-46412630.pdf?src-supplier=Element14, Construction=Cylindrical, JESD-609 Code=e3, Lead Diameter=0.78mm, Lead Length=20.25mm, Mounting Technology="Through Hole", Packaging="Tape and Reel", Pins=2, Pricing="1=0.4582, 10=0.4566, 25=0.4549, 100=0.4533, 250=0.4517, 500=0.4501, 1000=0.4485 (USD)", Reach SVHC Compliant=Yes, RoHS=Yes, RoHS Compliant=Yes, Stock=1088, Supplier="Arrow Electronics", Supplier Part Number=HVR3700001004FR500, Technology="METAL FILM", Terminal Finish=Tin, Termination=Wire
S1: "Keypad Switch, 1 Switches, SPST, Momentary, 0.05A, 24VDC, 2.06N, 4 PCB Hole Cnt, Solder Terminal, Through Hole-straight", Actuator Color=Black, Contact Current(DC)-Max=50mA, Contact DC Max Rating R Load=.05A@24VDC, Contact Resistance=0.1mR, Contact Voltage(DC)-Max=24V, Dielectric Withstand Volts=500VACV, Insulation Resistance=100MR, Manufacturer="TE Connectivity", Manufacturer Part Number=2-1825910-7, Max Operating Temperature=85°C, Min Operating Temperature=-35°C, Operating Force-Max=2.06N, Supplier Part Number=450-1642-ND, Actuator Angle=0°, Actuator Length=0.37inch, Actuator Material=Nylon, Actuator Travel=0.254mm, Actuator Type=Pushbutton, Body Breadth=5.99mm, Body Height=3.61mm, Body Length or Diameter=5.99mm, Category="Pushbutton Switches", Center Contact Plating=Silver, Circuit Configuration=1X1, ComponentLink1Description=https://www.te.com:443/usa-en/product-2-1825910-7.datasheet.pdf?src-supplier=IHS+Markit, ComponentLink1URL=https://www.te.com:443/usa-en/product-2-1825910-7.datasheet.pdf?src-supplier=IHS+Markit, ComponentLink2Description=https://datasheet.ciiva.com/30233/mrw444-30233541.pdf?src-supplier=Onlinecomponents.com, ComponentLink2URL=https://datasheet.ciiva.com/30233/mrw444-30233541.pdf?src-supplier=Onlinecomponents.com, Contact Function=OFF-(ON), Contact Material="Copper Alloy", End Contact Material="Copper Alloy", End Contact Plating=Silver, Housing Material=Nylon, Mounting Technology="Through Hole", Number of Switches=1, PCB Hole Count=4, Pricing="1=0.14, 10=0.126, 25=0.1184, 100=0.1065, 250=0.09884, 750=0.0902, 1500=0.08513, 3000=0.08042, 5250=0.07691 (USD)", Reach SVHC Compliant=Yes, RoHS=Yes, RoHS Compliant=Yes, Stock=45531, Supplier=Digikey, Switch Action=MOMENTARY, Switch Function=SPST, Switch Type=Keypad, Terminal Length=0.138inch, Terminal Material="Copper Alloy", Termination=Solder
Triac1: "Snubberless TRIAC, 600V V(DRM), 16A I(T)RMS, TO-220AB", Case Connection=Isolated, Hold Current=35mA, Leakage Current-Max=2mA, Manufacturer=STMicroelectronics, Manufacturer Part Number=BTA16-600CWRG, Max Operating Temperature=125°C, Min Operating Temperature=-40°C, Package Body Material=Plastic, Package Shape=Rectangular, Package Style="FLANGE MOUNTMeter", Repetitive Peak Off-state Voltage=600V, RMS Current (Irms)=16A, Supplier Part Number=511-BTA16-600CW, Additional Feature="UL RECOGNIZED", Category=TRIACs, ComponentLink1Description=https://datasheet.ciiva.com:443/pdfs/VipMasterIC/IC/SGST/SGST-S-A0005239301/SGST-S-A0005239301-1.pdf?src-supplier=IHS+Markit, ComponentLink1URL=https://datasheet.ciiva.com:443/pdfs/VipMasterIC/IC/SGST/SGST-S-A0005239301/SGST-S-A0005239301-1.pdf?src-supplier=IHS+Markit, ComponentLink2Description=https://datasheet.ciiva.com/15140/getdatasheetpartid-69796-15140332.pdf?src-supplier=Verical, ComponentLink2URL=https://datasheet.ciiva.com/15140/getdatasheetpartid-69796-15140332.pdf?src-supplier=Verical, ComponentLink3Description=https://datasheet.ciiva.com/1197/1699992-1197183.pdf?src-supplier=Element14, ComponentLink3URL=https://datasheet.ciiva.com/1197/1699992-1197183.pdf?src-supplier=Element14, ComponentLink4Description=https://datasheet.ciiva.com/1198/1699992-1198140.pdf?src-supplier=Element14, ComponentLink4URL=https://datasheet.ciiva.com/1198/1699992-1198140.pdf?src-supplier=Element14, ComponentLink5Description=https://datasheet.ciiva.com/16342/cd00002265-16342871.pdf?src-supplier=Future+Electronics, ComponentLink5URL=https://datasheet.ciiva.com/16342/cd00002265-16342871.pdf?src-supplier=Future+Electronics, JEDEC-95 Code=TO-220AB, JESD-30 Code=R-PSFM-T3, JESD-609 Code=e3, Number of Elements=1, Pins=3, Pricing="1=1.94, 10=1.47, 50=0.913, 100=0.817, 1000=0.525, 10000=0.497 (USD)", Qualification Status="Not Qualified", Reach SVHC Compliant=No, RoHS=Yes, RoHS Compliant=Yes, Stock=7, Supplier=Mouser, Surface Mount=No, Terminal Finish=Tin, Terminal Form="Through Hole", Terminal Position=SINGLE
U1: library part CMP-0190-00021-1, "RISC Microcontroller, 8-Bit, FLASH, PIC CPU, 20MHz, CMOS, PDIP8", Case/Package=DIP, Clock Frequency=20MHz, Manufacturer=Microchip, Max Operating Temperature=85°C, Max Supply Current=15mA, Max Supply Voltage=5.5V, Min Operating Temperature=-40°C, Min Supply Voltage=4.5V, Nominal Supply Voltage=5V, Package Body Material=Plastic, Package Equivalence Code=DIP8,.3, Package Shape=Rectangular, Power Supplies=2.5, Temperature Grade=INDUSTRIAL, Category=Microcontrollers, Code_JEDEC=MS-001, ComponentLink1Description=https://datasheet.ciiva.com:443/pdfs/VipMasterIC/IC/MCHP/MCHPS03141/MCHPS03141-1.pdf?src-supplier=IHS+Markit, ComponentLink1URL=https://datasheet.ciiva.com:443/pdfs/VipMasterIC/IC/MCHP/MCHPS03141/MCHPS03141-1.pdf?src-supplier=IHS+Markit, ComponentLink2Description=https://datasheet.ciiva.com/1487/41190g-1487425.pdf?src-supplier=Digikey, ComponentLink2URL=https://datasheet.ciiva.com/1487/41190g-1487425.pdf?src-supplier=Digikey, DatasheetVersion="revF, Sep-2009", Height - Seated (Max)=5.334mm, JESD-30 Code=R-PDIP-T8, JESD-609 Code=e3, Length=9.27mm, Manufacturer Part Number=PIC12F675-I/P, Note1="Refer to data sheet (DS41190F) for details of supply voltage range under different conditions.", Number of I/O Lines=6, PackageDescription="8-Lead Plastic Dual In-Line (P) - 300 mil Body [PDIP]", PackageReference=PDIP300-P8, PackageVersion="revBB, Aug-2009", Peripherals=POR,WDT, Pins=8, Pricing="60=1.483 (USD)", Qualification Status="Not Qualified", Reach SVHC Compliant=Yes, RoHS=Yes, RoHS Compliant=Yes, Stock=273, Supplier="Arrow Electronics", Supplier Part Number=PIC12F675-I/P, Surface Mount=No, Technology=CMOS, Terminal Finish=Tin, Terminal Form="Through Hole", Terminal Pitch=2.54mm, Terminal Position=DUAL, Width=7.62mm
V_ic: "Fixed Positive Standard Regulator, 5VBIPolar", Dropout Voltage1-Nom=2V, Input Voltage Absolute-Max=35V, Manufacturer="ON Semiconductor", Max Supply Voltage=20V, Min Input Voltage=7.5V, Operating Temperature, TJ-Max=125°C, Operating Temperature, TJ-Min=0°C, Output Current1-Max=1A, Output Voltage1-Max=5.25V, Output Voltage1-Min=4.75V, Output Voltage1-Nom=5V, Package Equivalence Code=SIP3,.1TB, Package Shape=Rectangular, Peak Reflow Temperature (Cel)=260°C, Time @ Peak Reflow Temperature-Max (s)=40s, Voltage Tolerance-Max=5%, Adjustability=FIXED, Category="Voltage Regulators - Linear", Channels=1, ComponentLink1Description=https://datasheet.ciiva.com:443/pdfs/VipMasterIC/IC/ONSM/ONSM-S-A0009067490/ONSM-S-A0009067422-1.pdf?src-supplier=IHS+Markit, ComponentLink1URL=https://datasheet.ciiva.com:443/pdfs/VipMasterIC/IC/ONSM/ONSM-S-A0009067490/ONSM-S-A0009067422-1.pdf?src-supplier=IHS+Markit, JESD-609 Code=e3, Manufacturer Part Number=MC7805CTG, Number of Outputs=1, Packaging=Rail/Tube, Pins=3, Pricing="1=0.5785, 10=0.4128, 25=0.345, 100=0.3219, 250=0.2882, 1000=0.2673, 2500=0.2314, 10000=0.1988, 20000=0.1969 (USD)", Qualification Status="Not Qualified", Reach SVHC Compliant=No, Regulator Type="FIXED POSITIVE SINGLE OUTPUT STANDARD REGULATOR", RoHS=Yes, RoHS Compliant=Yes, Stock=66265, Supplier="Arrow Electronics", Supplier Part Number=MC7805CTG, Surface Mount=No, Technology=BIPOLAR, Terminal Finish=Tin, Terminal Form="Through Hole", Terminal Pitch=2.54mm, Terminal Position=SINGLE

## Free pads (board coordinates)
  round 60 hole 82.68: 2(1405,95) 3(1435,2145) 5(65,65)
  round 60 hole 78.74: 4(75,2145) 6(710,575)

## Via types
v1: diameter 50, hole 28, Top Layer to Bottom Layer, 4 vias

## Nets (pads, with @x,y where several pads share a name; then routed paths per layer and width w, separated by ;. In a path a pad name is that pad's centre, name@x,y a point inside that pad or via, vN(x,y) a via of type N, cw(c..) or ccw(c..) an arc to the next point about the centre after c; other vN are vias at no path point)
+Vcc: J2.1 J3.2 R5.1 V_ic.3 | length 2972.5
  Top Layer w15: J2.1@753.74,1943.54 J2.1@755,1944.8
  Top Layer w30: J2.1@755,1944.8 755,2055 855,2155 1320,2155 1455,2020 1455,1635 1430,1610 1430,1346.3 R5.1 ; J3.2 1310,1490 1338.95,1461.05 1338.95,1327.35 R5.1 ; V_ic.3 1430,435 1430,1236.3 R5.1
Live: C1.2 J1.1 R1.2 R6.1 Triac1.1 | length 411.6
  Bottom Layer w15: J1.1@170,1261.1 J1.1@175,1266.1
  Bottom Layer w30: J1.1@170,1261.1 C1.2 203.7,991.85 R6.1
NetB1_1: B1.1 C2.2 D4.1 V_ic.1 | length 1230.2
  Top Layer w15: 1199.58,304.58 1205,310
  Top Layer w30: B1.1 978.16,515.7 978.16,474.05 D4.1 1143.39,317.2 1156.02,304.58 1199.58,304.58 ; 1205,310 1205,410 V_ic.1 1345,1008.43 C2.2
NetB1_2: B1.2 C1.1 R6.2 | length 1264
  Top Layer w15: C1.1 C1.1@170,439.07 ; R6.2@325,594.07 R6.2 ; B1.2@974.21,298.76 B1.2
  Top Layer w30: C1.1@170,439.07 R6.2@325,594.07 ; v1(762.62,98.89) 763.73,100 850,100 974.21,224.21 B1.2@974.21,298.76
  Bottom Layer w30: R6.2@315,606 317.15,606 R6.2 ; R6.2@328,593 760.35,160.65 760.35,101.15 v1(762.62,98.89)
NetB1_4: B1.4 R7.2 | length 369.4
  Top Layer w30: R7.2 746.85,310 805,310 B1.4
NetD1_2: D1.2 R4.2 | length 872.8
  Top Layer w15: R4.2 950.1,1261.75 950.1,1965.1 D1.2
NetJ1_2: J1.2 Triac1.2
NetJ3_1: J3.1 U1.1 | length 252.5
  Top Layer w30: U1.1 1199.8,1445 J3.1
NetO1_1: O1.1 R2.2 | length 598.5
  Top Layer w15: 468.83,896.17 470,895
  Top Layer w20: O1.1@470,803.38 O1.1@483.62,789.76
  Top Layer w30: 468.83,896.17 468.83,943.83 505,980 660,980 801.85,838.15 R2.2 ; O1.1 470,895
NetO1_4: O1.4 Triac1.3 | length 606
  Top Layer w30: Triac1.3 278.78,1624.61 O1.4
NetO1_6: O1.6 R1.1 | length 839.4
  Bottom Layer w30: v1(420,1910) 420,1904.59 470,1854.59 O1.6@470,1229.66 ; v1@420,1914.81 420,2008.15 R1.1
NetR4_1: R4.1 R5.2 S1.1 U1.2 U1.3 | length 1789.5
  Bottom Layer w15: U1.3 855,1505 923.15,1505 1305.74,1887.59 1313.41,1887.59 ; U1.2 903.43,1436.57 903.43,1419.12 905,1417.55 905,913.15 R4.1 ; S1.1 1265.24,1887.59 1313.41,1887.59 ; R5.2 1415,1725 1415,1786 1313.41,1887.59
Neutral: R7.1 | length 125.6
  Top Layer w30: v1(70,170) 153.15,170 R7.1
"Triac output": B1.3 C2.1 D1.1 D4.2 J2.2 J2.3 J3.3 O1.2 R2.1 S1.2 U1.4 U1.5 U1.6 U1.7 U1.8 V_ic.2 | length 2671.4
  Top Layer w20: U1.6 795,1665 745,1615 745,1335 833.54,1246.46 835.39,1246.46 848.15,1233.7 R2.1@848.15,1231.85 ; v1(1070,1785) 1070,1732.28 J3.3
  Top Layer w30: B1.3@875.79,524.65 875.79,640.79 927.8,692.8 D4.2
  Bottom Layer w10: U1.4@686.64,1453.36 686.64,1461.64 697.97,1461.64 U1.4@703.99,1467.66
  Bottom Layer w15: J2.3@596.26,1943.54 596.26,1543.74 686.64,1453.36 U1.4 ; U1.6 795,1800 835,1840 1015,1840 v1(1070,1785) ; D1.1 988.84,2103.84 1226.16,2103.84 S1.2
pads on no net: O1.3 O1.5 S1.MH1 S1.MH2

## Polygon pours and split planes (outlines as drawn)
"Triac output" on Bottom Layer "TRIAC_OUTPUT_L02_P003" (solid, remove dead copper, pour order 3): 625,2130 1315,2130 1315,705 1475,545 1475,200 1205,200 1205,405 910,700 515,700 515,2020
Live on Bottom Layer "LIVE_L02_P000" (solid, pour order 0): 25,2085 120,2085 335,1870 335,1170 25,1170
NetJ1_2 on Top Layer "NETJ1_2_L01_P001" (solid, pour order 1): 25,1775 315,1775 315,1410 240,1335 25,1335

## Silkscreen, mask and mechanical layers (free items; w line width, h text height)
Top Overlay:
  region: 1270.68,120.57 1269.6,120.57 1269.6,122.75 1273.95,122.75 1273.95,121.66 1275.04,121.66 1275.04,120.57 1271.77,120.57
  region: 1239.13,122.75 1241.31,122.75 1241.31,121.66 1236.96,121.66 1236.96,122.75 1238.04,122.75
  region: 1228.25,122.75 1230.43,122.75 1230.43,121.66 1227.16,121.66 1227.16,122.75
  region: 1203.23,120.57 1201.05,120.57 1201.05,122.75 1205.4,122.75 1205.4,120.57 1204.32,120.57
  region: 1151,122.75 1151,119.49 1146.65,119.49 1146.65,122.75 1149.91,122.75
  region: 1130.33,120.57 1131.42,120.57 1131.42,119.49 1127.07,119.49 1127.07,120.57 1129.24,120.57
  region: 1055.26,122.75 1056.34,122.75 1056.34,119.49 1051.99,119.49 1051.99,122.75 1054.17,122.75
  region: 1045.46,122.75 1048.73,122.75 1048.73,119.49 1042.2,119.49 1042.2,122.75 1044.38,122.75
  region: 1031.32,121.66 1031.32,122.75 1035.67,122.75 1035.67,121.66 1032.41,121.66
  region: 1021.53,122.75 1021.53,121.66 1017.18,121.66 1017.18,122.75 1020.44,122.75
  region: 889.88,122.75 894.23,122.75 894.23,121.66 889.88,121.66
  region: 926.87,120.57 926.87,119.49 922.52,119.49 922.52,122.75 926.87,122.75 926.87,121.66
  region: 967.13,119.49 964.95,119.49 964.95,120.57 968.22,120.57 968.22,119.49
  region: 986.71,121.66 986.71,122.75 991.06,122.75 991.06,119.49 985.62,119.49 985.62,121.66
  region: 5 vertices and 31 holes, not listed, extent 848.53,102.08 1293.53,235.9
  text "In" at 105,1870 h39.37 r270
  text "L" at 50,1270 h60 r270
  text "Iron_Genius_V2" at 850,30 h30
Bottom Overlay:
  text "N" at 85,215 h60 r90